# EAGLE board piezo-preamp-tickler_V2-RevX (EAGLE 8.3.2)
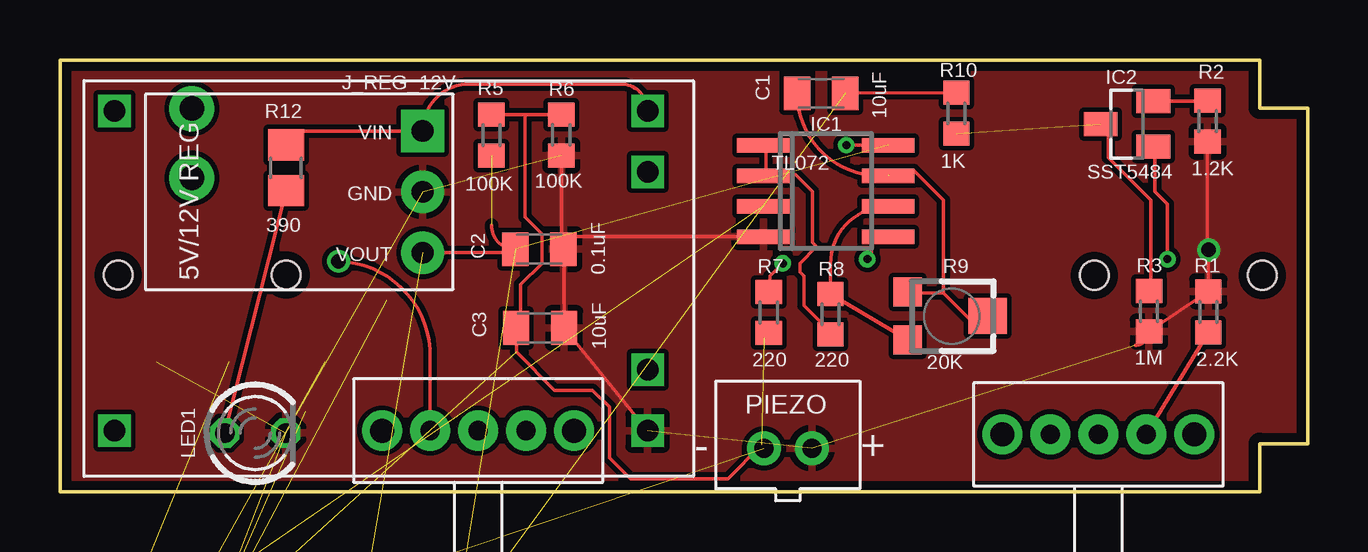
[diagram p0: board, top side]
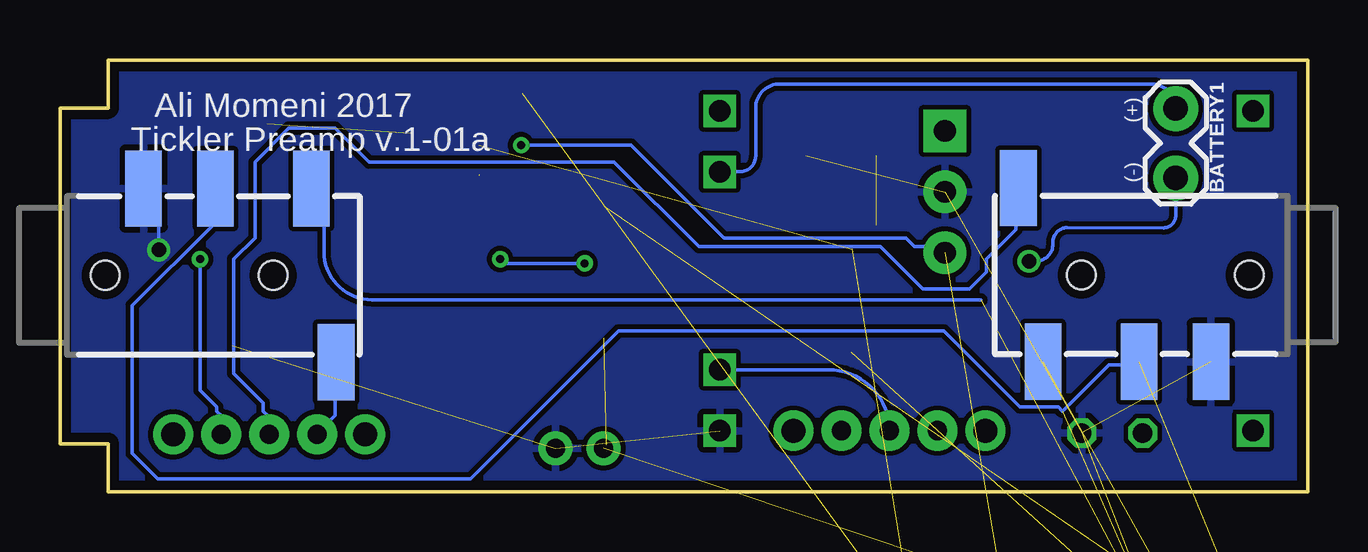
[diagram p1: board, bottom side, seen from below]

Size 52 x 18 mm. Coordinates in mm from the lower left corner, seen from the top.
Outline: 0,0 50,0 50,2 52,2 52,16 50,16 50,18 0,18 0,0
Copper layers (1*16): Top 0.0356mm / dielectric 1.5011mm / Bottom 0.0356mm
Design rules "oshpark-2layer": minimum track width 6mil, minimum drill 13mil, track to track 6mil, track to pad 6mil, pad to pad 6mil, via to via 6mil, smd to smd 6mil, copper to edge 15mil, drill to drill 6mil, minimum pad ring 7mil, minimum via ring 7mil, stop-mask expansion 2.5mil, vias tented up to drill 0mil, thermal gap 10mil
Net classes: 0 default: width 0.152 mm, clearance 0.2 mm

## Footprints (pad centres in the part's own frame; a part is rotated, then mirrored left to right if it is on the bottom)
1X02_LOCK = drill 1.016 pad 1.88: 1 -0.178,0; 2 2.718,0
C0805K = smd 1.1 x 1.4: 1 -1,0; 2 1,0
SOD123 = smd 1.4 x 1.4: A 1.9,0; C -1.9,0
SO08 = smd 0.6 x 2.2: 1 -1.905,-2.6; 2 -0.635,-2.6; 3 0.635,-2.6; 4 1.905,-2.6; 5 1.905,2.6; 6 0.635,2.6; 7 -0.635,2.6; 8 -1.905,2.6
SOT23 = smd 1 x 1.4: 1 -0.95,-1.1; 2 0.95,-1.1; 3 0,1.1
POLOLU_5V-12V_STEPUP_U3V12F5-U3V12F12 = drill 0.9 pad 1.778: GND 0,-6.35; VOUT -2.54,-6.35 | drill 0.9 pad 1.778 square: VIN 2.54,-6.35
LBC-SE = drill 0.914 octagon: 1 -2.54,0; 2 2.54,0
LED3MM = drill 0.813 octagon: A -1.27,0; K 1.27,0
JST-PH-2-THM = drill 0.8 pad 1.422: 1 1,0; 2 -1,0
SWITCH_SPDT-TE-CONNECT = drill 0.8 pad 1.676: 1 2,0; 2 4,0; 3 6,0 | drill 1 pad 1.676: MOUNT1 0,0; MOUNT2 8,0
R0603 = smd 1 x 1.1: 1 -0.85,0; 2 0.85,0
TC33X = smd 1.2 x 1.2: 1 -1,-1.825; 3 1,-1.825 | smd 1.5 x 1.6: 2 0,1.5
R0805 = smd 1.3 x 1.5: 1 -0.95,0; 2 0.95,0
DPDT_SMT_JS202011SCQN = smd 1.2 x 2.5: P$1 -2.5,-4; P$2 0,-4; P$3 2.5,-4; P$4 2.5,4; P$5 0,4; P$6 -2.5,4
AUDIO-JACK-TRRS-SMD = smd 1.524 x 3.175: EARTH 11.227,-3.619; RING1 6.2,3.619; RING2 3.2,3.619; TIP 10.2,3.619 | hole 1.2: 1.6,0; 8.6,0
TP4056-LITHIUM-PROTECTED-MODULE = drill 0.9 square: B+ 10.795,4.445; B- 10.795,-3.81; IN+ -11.43,6.985; IN- -11.43,-6.35; OUT+ 10.795,6.985; OUT- 10.795,-6.35

## Placement (x,y rotation side)
BATTERY1  [1X02_LOCK]  5.5,15.79 270 bottom
C1  10uF  [C0805K]  31.73,16.61 0 top
C2  0.1uF  [C0805K]  19.98,10.11 0 top
C3  10uF  [C0805K]  20.01,6.83 0 top
C4  0.1uF  [C0805K]  -6,-191 0 top  (outside the outline)
C5  10uF  [C0805K]  6,-191 0 top  (outside the outline)
C6  10uF  [C0805K]  11,-191 0 top  (outside the outline)
C7  0.1uF  [C0805K]  -16,-136 0 top  (outside the outline)
C8  0.1uF  [C0805K]  0,-191 0 top  (outside the outline)
C9  0.1uF  [C0805K]  9,-273 0 top  (outside the outline)
C10  10uF  [C0805K]  21,-273 0 top  (outside the outline)
C11  0.1uF  [C0805K]  -16,-297 0 top  (outside the outline)
C12  10uF  [C0805K]  -16,-307 0 top  (outside the outline)
C13  100uF  [C0805K]  -16,-312 0 top  (outside the outline)
D1  [SOD123]  -14,-59 0 top  (outside the outline)
D2  [SOD123]  -14,-63 0 top  (outside the outline)
D3  [SOD123]  -14,-197 0 top  (outside the outline)
D4  [SOD123]  -5,-197 0 top  (outside the outline)
D5  BAT45S  [SOD123]  -14,-279 0 top  (outside the outline)
D6  [SOD123]  -5,-279 0 top  (outside the outline)
IC1  TL072  [SO08]  31.92,12.54 270 top
IC2  SST5484  [SOT23]  44.47,15.33 90 top
IC3  OPA1612  [SO08]  5,-173 0 top  (outside the outline)
IC4  J201  [SOT23]  -16,-202 0 top  (outside the outline)
IC5  SST5484  [SOT23]  -16,-266 0 top  (outside the outline)
IC6  TL072  [SO08]  22,-253 0 top  (outside the outline)
J_REG_12V  POLOLU_VOLTAGE_REGULATORS_3PIN  [POLOLU_5V-12V_STEPUP_U3V12F5-U3V12F12]  8.77,12.5 90 top
L1  100uH  [LBC-SE]  -9,-146 0 top  (outside the outline)
L2  100uH  [LBC-SE]  -9,-174 0 top  (outside the outline)
L3  100uH  [LBC-SE]  8,-255 0 top  (outside the outline)
L4  100uH  [LBC-SE]  -9,-287 0 top  (outside the outline)
LED1  [LED3MM]  8.14,2.44 0 top
PIEZO  [JST-PH-2-THM]  30.34,1.81 0 top
PIEZO1  [JST-PH-2-THM]  -10,-160 0 top  (outside the outline)
PIEZO2  [JST-PH-2-THM]  -10,-255 0 top  (outside the outline)
POWER  SPDT  [SWITCH_SPDT-TE-CONNECT]  13.43,2.54 0 top
R1  2.2K  [R0603]  47.86,7.49 270 top
R2  1.2K  [R0603]  47.83,15.45 90 top
R3  1M  [R0603]  45.39,7.52 90 top
R4  100K  [R0603]  -8,-184 0 top  (outside the outline)
R5  100K  [R0603]  17.98,14.86 270 top
R6  100K  [R0603]  20.9,14.87 90 top
R7  220  [R0603]  29.54,7.46 270 top
R8  220  [R0603]  32.12,7.39 90 top
R9  20K  [TC33X]  37.16,7.32 270 top
R10  1K  [R0603]  37.37,15.78 90 top
R11  100K  [R0603]  -2,-9 0 top  (outside the outline)
R12  390  [R0805]  9.42,13.5 90 top
R13  10M  [R0603]  -2,-14 0 top  (outside the outline)
R14  100K  [R0603]  -2,-184 0 top  (outside the outline)
R15  220  [R0603]  -17,-191 0 top  (outside the outline)
R16  220  [R0603]  -12,-191 0 top  (outside the outline)
R17  20K  [TC33X]  -14,-186 0 top  (outside the outline)
R18  100K  [R0603]  4,-184 0 top  (outside the outline)
R19  10M  [R0603]  10,-184 0 top  (outside the outline)
R20  1.2K  [R0603]  -17,-209 0 top  (outside the outline)
R21  2.2K  [R0603]  -11,-209 0 top  (outside the outline)
R22  2.2K  [R0603]  -17,-302 0 top  (outside the outline)
R24  220  [R0603]  -12,-273 0 top  (outside the outline)
R25  220  [R0603]  -7,-273 0 top  (outside the outline)
R26  1.2K  [R0603]  18,-265 0 top  (outside the outline)
R27  2.2K  [R0603]  24,-265 0 top  (outside the outline)
R28  1M  [R0603]  -2,-273 0 top  (outside the outline)
R29  1K  [R0603]  3,-273 0 top  (outside the outline)
R30  20K  [TC33X]  -6,-267 0 top  (outside the outline)
R31  100K  [R0603]  12,-265 0 top  (outside the outline)
R32  10M  [R0603]  -17,-273 0 top  (outside the outline)
SW1-DPDT  OUTPUT-select  [DPDT_SMT_JS202011SCQN]  -14,-48 0 top  (outside the outline)
SW1-DPDT1  OUTPUT-select  [DPDT_SMT_JS202011SCQN]  11,-239 0 top  (outside the outline)
SW2-SPST  INPUT-select  [SWITCH_SPDT-TE-CONNECT]  39.28,2.38 0 top
SW2-SPST1  INPUT-select  [SWITCH_SPDT-TE-CONNECT]  -10,-239 0 top  (outside the outline)
TO-HEADSET  AUDIO-JACK3LGPADS  [AUDIO-JACK-TRRS-SMD]  51.72,9.02 0 bottom
TO-HEADSET1  AUDIO-JACK3LGPADS  [AUDIO-JACK-TRRS-SMD]  -16,-221 0 top  (outside the outline)
TO-PHONE  AUDIO-JACK3LGPADS  [AUDIO-JACK-TRRS-SMD]  0.82,9.03 180 bottom
TO-PHONE1  AUDIO-JACK3LGPADS  [AUDIO-JACK-TRRS-SMD]  -1,-221 0 top  (outside the outline)
USB-LIPO-CHARGER  TP4056-MODULE  [TP4056-LITHIUM-PROTECTED-MODULE]  13.7,8.89 0 top

## Library data of the parts
BATTERY1 = SparkFun-Connectors; NEG: (-); POS: (+)
C1-C13 PIEZO PIEZO1 PIEZO2 R9 R17 R30 = adafruit
D1-D6 = diode
IC1 IC3 IC6 = linear
IC2 IC4 IC5 = transistor-fet
J_REG_12V R1-R8 R10-R16 R18-R22 R24-R29 R31 R32 SW2-SPST1 USB-LIPO-CHARGER = CMU-ArtFab
L1-L4 = inductors
LED1 = led
POWER = CMU-ArtFab; POWER: power
SW1-DPDT SW1-DPDT1 = microbuilder; BOTTOM: buffer2-phone; DIGIKEY: 401-2002-1-ND; DIGIKEY2: 563-1342-1-ND; TOP: opamp
SW2-SPST = CMU-ArtFab; INPUT: input
TO-HEADSET = Daniel; HEADSET: HEADSET
TO-HEADSET1 TO-PHONE1 = Daniel
TO-PHONE = Daniel; PHONE: phone

## Nets
+12V: D5.C J_REG_12V.VOUT L1.1 L2.1 L3.1 R22.2
-12V: D6.A L4.1
GND: C2.2 C3.2 C4.2 C6.2 C7.2 C8.2 C9.2 C11.1 C12.2 D2.C D4.C IC1.4 IC3.4 J_REG_12V.GND LED1.K PIEZO1.1 PIEZO2.1 PIEZO.1 R1.1 R2.1 R3.1 R6.1 R14.1 R20.1 R21.1 R24.2 R26.1 R27.1 R28.1 R32.1 TO-HEADSET1.RING2 TO-HEADSET.RING2 TO-PHONE1.RING2 TO-PHONE.RING2 USB-LIPO-CHARGER.OUT-
IN+: USB-LIPO-CHARGER.IN+
IN-: USB-LIPO-CHARGER.IN-
N$1: C13.1 IC3.1 IC3.2
N$2: PIEZO.2 R11.1
N$3: IC2.2 R2.2
N$5: IC1.5 R7.1
N$6: C2.1 IC1.8 L1.2 R5.2
N$7: IC1.6 R8.2 R9.3
N$8: D1.A D2.A
N$9: D1.C IC1.3 R11.2 R13.2
N$10: IC2.3 R3.2 R10.1
N$11: C1.2 R10.2 SW1-DPDT.P$3 SW1-DPDT.P$4
N$12: SW2-SPST.1 TO-HEADSET.EARTH
N$13: SW1-DPDT.P$5 TO-HEADSET.TIP
N$14: IC1.1 IC1.2 R8.1
N$15: SW1-DPDT.P$2 TO-HEADSET.RING1
N$16: IC3.5 R15.1
N$17: SW2-SPST.2 TO-PHONE.EARTH
N$18: LED1.A R12.1
N$19: BATTERY1.1 USB-LIPO-CHARGER.B+
N$20: POWER.2 USB-LIPO-CHARGER.B-
N$21: BATTERY1.2 POWER.1
N$22: IC3.6 R16.2 R17.3
N$23: C5.2
N$24: PIEZO1.2 R18.1
N$25: IC3.3 IC4.1 R21.2 R22.1
N$26: SW1-DPDT.P$1 TO-PHONE.RING1
N$27: SW1-DPDT.P$6 TO-PHONE.TIP
N$28: C3.1 C7.1 R5.1 R6.2 R7.2 R13.1
N$29: D3.A D4.A
N$30: IC5.2 R26.2
N$31: C5.1 IC3.7 R17.1 R17.2
N$32: C4.1 IC3.8 L2.2 R4.2
N$33: C12.1 IC4.2 R20.2
N$34: IC6.1 IC6.2 R25.1
N$35: C6.1 C8.1 R4.1 R14.2 R15.2 R19.1
N$36: D3.C IC4.3 R18.2 R19.2
N$37: IC6.5 R24.1
N$38: IC6.6 R25.2 R30.3
N$39: IC5.3 R28.2 R29.1
N$41: C1.1 IC1.7 R9.1 R9.2
N$42: C10.2 R29.2 SW1-DPDT1.P$3 SW1-DPDT1.P$4
N$43: SW2-SPST1.1 TO-HEADSET1.EARTH
N$44: SW1-DPDT1.P$5 TO-HEADSET1.TIP
N$45: SW1-DPDT1.P$2 TO-HEADSET1.RING1
N$46: SW2-SPST1.2 TO-PHONE1.EARTH
N$47: PIEZO2.2 R31.1
N$48: SW1-DPDT1.P$1 TO-PHONE1.RING1
N$49: SW1-DPDT1.P$6 TO-PHONE1.TIP
N$50: C11.2 IC6.4 L4.2
N$52: C13.2 R16.1
N$53: C10.1 IC6.7 R30.1 R30.2
N$54: C9.1 IC6.8 L3.2
N$55: D5.A D6.C IC6.3 R31.2 R32.2
SELECT: IC2.1 R1.2 SW2-SPST.3
SELECT1: IC5.1 R27.2 SW2-SPST1.3
VBAT: J_REG_12V.VIN R12.2 USB-LIPO-CHARGER.OUT+

## Tracks (layer width: path | path; a pad name or v marks a point on that pad's centre or on a via)
+12V  (via drill 0.33)  (5 unrouted)
  Top 0.152: 18.83,9.96 J_REG_12V.VOUT | v32.77,14.45 34.36,14.45
  Bottom 0.152: v32.77,14.45 28.19,14.45 24.32,10.57 16.74,10.57 16.39,10.22 15.33,10.22 15.15,10.04 J_REG_12V.VOUT
-12V  (1 unrouted)
GND  (via drill 0.6)  (27 unrouted)
  Top 0.152: C2.2 arc-90 21.01,10.08 C3.2 USB-LIPO-CHARGER.OUT- | C2.2 arc-90 20.9,10.19 R6.1 | C2.2 arc-90 21.5,10.63 IC1.4 | R2.1 47.83,10.13 arc90 v47.88,10.08 arc90 47.86,10.06 R1.1 R3.1 arc-90 44.82,6.1
  Bottom 0.152: v47.88,10.08 47.88,12 arc-90 TO-HEADSET.RING2
  pour Top: -1,19.03 53,19.03 53,-0.97 -1,-0.97
  pour Bottom: -1,19.03 53,19.03 53,-0.97 -1,-0.97
N$1  (2 unrouted)
N$2  (1 unrouted)
N$3
  Top 0.152: IC2.2 47.83,16.28 R2.2
N$5  (via drill 0.33)
  Top 0.152: v30.13,9.52 29.6,8.99 29.6,8.46 R7.1 | v33.65,9.69 33.83,9.87 33.83,10.4 34.01,10.57 34.36,10.57 IC1.5
  Bottom 0.152: v30.13,9.52 33.48,9.52 v33.65,9.69
N$6  (3 unrouted)
  Top 0.152: C2.1 arc-90 17.98,11.11
N$7
  Top 0.152: R9.3 R8.2 32.12,9.49 arc-90 IC1.6
N$8  (1 unrouted)
N$9  (3 unrouted)
N$10  (1 unrouted)
  Top 0.152: R3.2 45.46,8.46 45.46,12.16 43.7,13.92 43.7,14.98 43.52,15.15 IC2.3
N$11  (2 unrouted)
  Top 0.152: C1.2 R10.2
N$12
  Bottom 0.152: TO-HEADSET.EARTH 40.53,5.29 40.53,3.17 41.23,2.47 SW2-SPST.1
N$13  (1 unrouted)
  Bottom 0.152: 13.61,8 39,8 arc90 41,10 41,12 arc90 41.52,12.52 TO-HEADSET.TIP
N$14
  Top 0.152: 29.43,13.21 30.66,13.21 31.36,12.51 31.36,10.4 31.54,10.22 30.84,9.52 30.84,9.16 31.01,8.99 31.01,7.75 32.07,6.7 R8.1 | 29.43,13.21 29.43,14.27 IC1.1 | 29.43,13.21 IC1.2
N$15  (1 unrouted)
  Bottom 0.152: 7.05,5.29 8.28,5.29 10.22,3.35 10.4,3.52 11.98,3.52 15.15,6.7 28.72,6.7 34.89,0.53 47.93,0.53 48.98,1.59 48.98,7.75 45.64,11.1 45.64,12.51 TO-HEADSET.RING1
N$16  (1 unrouted)
N$17
  Bottom 0.152: TO-PHONE.EARTH 12.16,12.51 12.16,10.92 13.39,9.69 13.39,9.16 14.1,8.46 16.03,8.46 17.8,10.22 25.37,10.22 28.9,13.74 39.12,13.74 40.53,15.15 42.46,15.15 43.87,13.74 43.87,10.57 44.76,9.69 44.76,4.93 43.52,3.7 43.52,3.35 43.34,3.17 43.34,2.47 SW2-SPST.2
N$18
  Top 0.152: LED1.A R12.1
N$19
  Bottom 0.152: USB-LIPO-CHARGER.B+ 23.66,13.34 arc-90 23,14 23,16 arc90 22,17 6.52,17 arc90 BATTERY1.1
N$20
  Bottom 0.152: USB-LIPO-CHARGER.B- 19.97,5.08 arc90 POWER.2
N$21  (via drill 0.6)
  Top 0.152: POWER.1 15.43,5.57 arc90 v11.61,9.61
  Bottom 0.152: 5.46,13.05 arc-90 BATTERY1.2 5.5,11.51 arc90 6,11 10.03,11.02 arc-90 10.62,10.32 arc90 11.34,9.61 v11.61,9.61
N$22  (2 unrouted)
N$24  (1 unrouted)
N$25  (3 unrouted)
N$26  (1 unrouted)
N$27  (1 unrouted)
N$28  (3 unrouted)
  Top 0.152: R7.2 arc90 29.34,6.41 | R6.2 19.38,15.72 | 19.38,15.72 18,15.72 arc90 R5.1 | 29.25,1.94 27.84,0.53 23.79,0.53 22.91,1.41 22.91,3.52 22.2,4.23 20.61,4.23 19.03,5.82 19.03,6.7 C3.1 19.03,6.87 19.21,7.05 19.21,8.63 20.09,9.52 20.09,10.75 19.38,11.45 19.38,15.72
N$29  (1 unrouted)
N$30  (1 unrouted)
N$31  (3 unrouted)
N$32  (3 unrouted)
N$33  (2 unrouted)
N$34  (2 unrouted)
N$35  (5 unrouted)
N$36  (3 unrouted)
N$37  (1 unrouted)
N$38  (2 unrouted)
N$39  (2 unrouted)
N$41  (1 unrouted)
  Top 0.152: IC1.7 34.16,13.17 arc-90 C1.1 | 36.83,8.28 35.42,8.28 R9.1 | 36.83,8.28 37.88,7.22 38.59,7.22 R9.2 | 36.83,8.28 36.83,12.16 35.59,13.39 34.71,13.39 34.53,13.21
N$42  (3 unrouted)
N$43  (1 unrouted)
N$44  (1 unrouted)
N$45  (1 unrouted)
N$46  (1 unrouted)
N$47  (1 unrouted)
N$48  (1 unrouted)
N$49  (1 unrouted)
N$50  (2 unrouted)
N$52  (1 unrouted)
N$53  (3 unrouted)
N$54  (2 unrouted)
N$55  (4 unrouted)
SELECT  (via drill 0.33)
  Top 0.152: SW2-SPST.3 R1.2 | v46.16,9.69 46.16,11.98 45.64,12.51 45.64,14.27 IC2.1
  Bottom 0.152: v46.16,9.69 46.16,4.23 45.46,3.52 45.46,3.35 45.28,3.17 45.28,2.47 SW2-SPST.3
SELECT1  (2 unrouted)
VBAT
  Top 0.152: R12.2 arc-90 10.01,15.04 J_REG_12V.VIN arc-90 17.08,17 23.37,17 arc-90 USB-LIPO-CHARGER.OUT+

## Text on the board
bNames: Ali Momeni 2017 | Tickler Preamp v.1-01a